# Altium PCB Access_System_ADP.PcbDoc
Units mil, origin at the board's own origin, x right, y up, seen from the top; angles counter-clockwise.
Board outline 2200 x 1400 mil, 2 copper layers (Top Layer, Bottom Layer); 4 components, 7 nets, 43 pads, 7 vias.
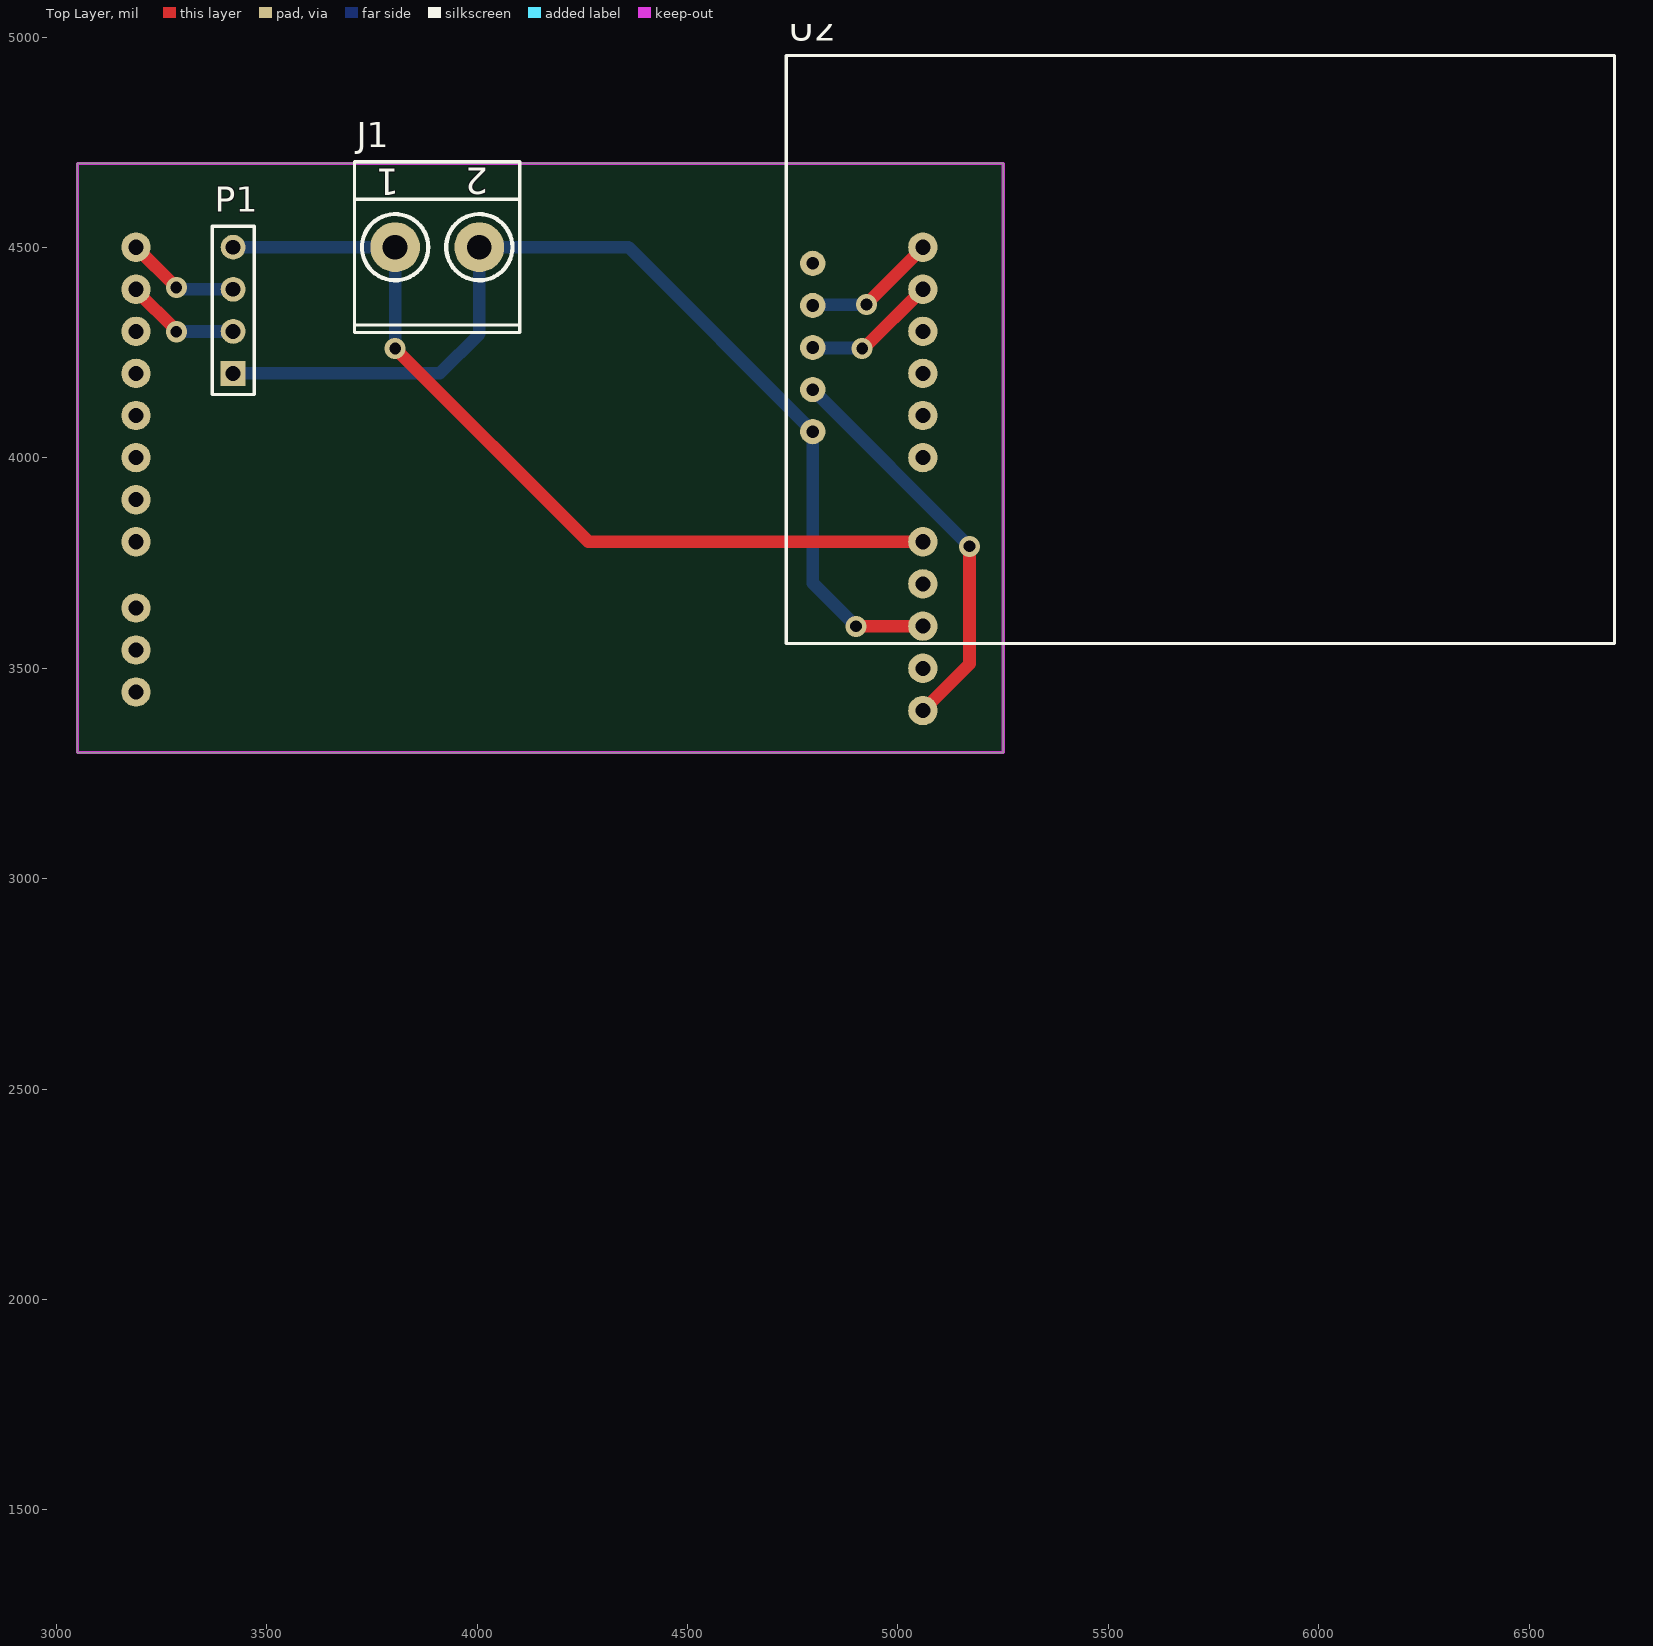
[diagram p0: Top Layer view]
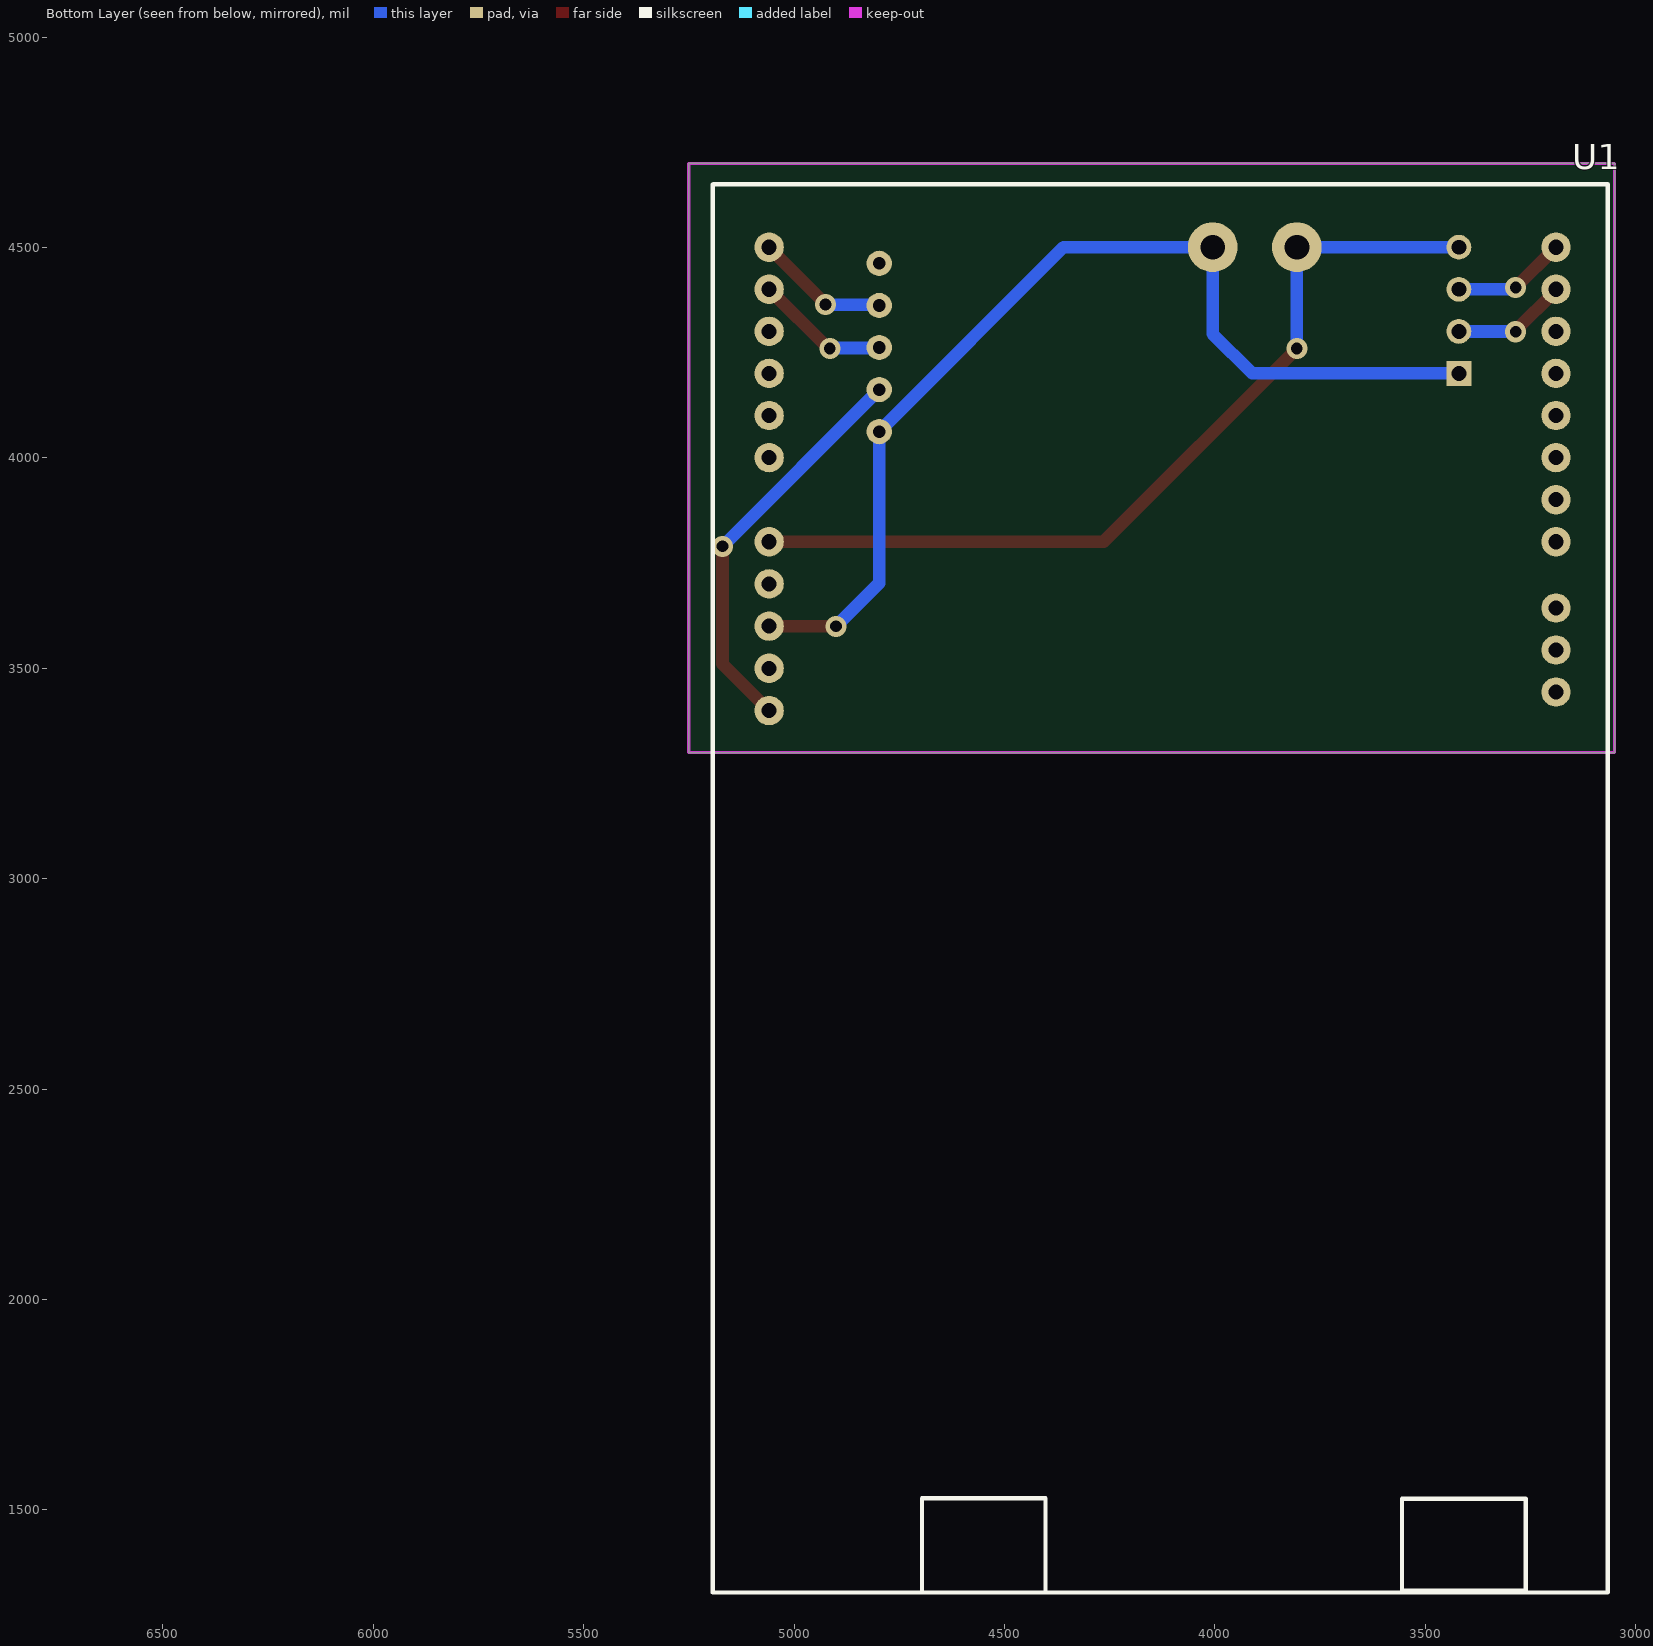
[diagram p1: Bottom Layer view, seen from below]

## Layer stack, top to bottom
Top Solder: solder mask 0.4, Solder Resist, Dk 3.5
Top Layer: signal copper 1.4
Dielectric 1: dielectric 12.6, FR-4, Dk 4.8
Bottom Layer: signal copper 1.4
Bottom Solder: solder mask 0.4, Solder Resist, Dk 3.5

## Board outline
3050,3300 5250,3300 5250,4700 3050,4700

## Design rules (kind name [scope] priority, off if disabled: settings)
Clearance [All] p1: gap=10 ignorepadtopadclearanceinfootprint=FALSE except(0: Arc-Hole Track-Hole SMDPad-Hole THPad-Hole Via-Hole Fill-Hole Poly-Hole Region-Hole Text-Hole)
PolygonConnect [All] p1: connectstyle=Relief reliefconductorwidth=10 reliefentries=4 polygonreliefangle="90 Angle" airgapwidth=10
RoutingVias [All] p1: holewidth=28 width=50 viastyle="Through Hole" minholewidth=28 minwidth=50 maxholewidth=28 maxwidth=50
SolderMaskExpansion [All] p1: expansion=4 istentingtop=FALSE
Width [All] p1: maxlimit=60 minlimit=10 preferedwidth=30 minimp=50.000000 maximp=50.000000 favimp=50.000000
30 further rules are at their usual default settings.

## Components (designator, comment, footprint, x,y, rotation, side; value= is the part's Value field where it differs from the comment)
J1 "Terminal_Block" "terminal block" 4005,4500.91 r90 top
P1 "Barcode" HDR1X4 3420,4200.91 r90 top
U1 "ADP_Corvette_T1" Corvette_T1 4232.06,3215.66 r90 bottom
U2 "ESP12_F_Module" ESP12_F_Holtek 4734.51,4956.59 r270 top

## Footprints (in the part's own frame and the unit in brackets; to place one, negate y for a bottom-side part, rotate by r counter-clockwise, add the part's x,y. Pads: shape width x height; smd on the part's side, far side on the other; paste and mask are expansions set on the pad)
Corvette_T1 [mil]
  rect 70x70 on Mech1: 1(-116.72,827.14)
  round 70 on Mech1: 2(-16.44,827.14) 3(83.84,827.14) 26(128.29,-1042.94) 27(28.46,-1042.94) 28(-71.36,-1042.94) 29(-171.19,-1042.94) 30(-271.01,-1042.94) 31(-370.84,-1042.94) 32(-470.66,-1042.94)
  round 70 hole 35.98: 4(184.12,827.14) 5(284.4,827.14) 6(384.68,827.14) 7(484.96,827.14) 8(585.24,827.14) 9(785.24,827.14) 10(885.24,827.14) 11(985.24,827.14) 12(1085.24,827.14) 13(1185.24,827.14) 14(1285.24,827.14) 15(1285.24,-1042.94) 16(1185.24,-1042.94) 17(1085.24,-1042.94) 18(985.24,-1042.94) 19(885.24,-1042.94) 20(785.24,-1042.94) 21(685.24,-1042.94) 22(585.24,-1042.94) 23(427.76,-1042.94) 24(327.94,-1042.94) 25(228.11,-1042.94)
  silkscreen extent -1912,-1166 1435,961
ESP12_F_Holtek [mil] "Holtek_Wi-Fi_module"
  round 60 hole 30: 1(494.09,62.99) 2(594.09,62.99) 3(694.09,62.99) 4(794.09,62.99) 5(894.09,62.99)
  silkscreen extent 0,0 1398,1969
HDR1X4 [mm] "Connector; Header; 4 Position"
  rect 1.5x1.5 hole 0.9: 1(0,0)
  round 1.5 hole 0.9: 2(2.54,0) 3(5.08,0) 4(7.62,0)
  silkscreen extent -1.27,-1.27 8.89,1.27
"terminal block" [mm]
  round 3 hole 1.5 paste+0 mask+0.051: 1(0,5.08) 2(0,0)
  silkscreen extent -5.15,-2.44 5.15,7.54

## Part data
J1: library part "Terminal Block"
P1: library part "Header 4", "Header, 4-Pin", LatestRevisionDate=17-Jul-2002, LatestRevisionNote="Re-released for DXP Platform.", Publisher="Altium Limited"
U1: library part Corvette_T1
U2: library part ESP12_F_Holtek

## Via types
v1: diameter 50, hole 28, Top Layer to Bottom Layer, 7 vias

## Nets (pads, with @x,y where several pads share a name; then routed paths per layer and width w, separated by ;. In a path a pad name is that pad's centre, name@x,y a point inside that pad or via, vN(x,y) a via of type N, cw(c..) or ccw(c..) an arc to the next point about the centre after c; other vN are vias at no path point)
3.3V: U1.4 U2.4 | length 962.9
  Top Layer w30: U1.4 5170,3510.58 v1(5170,3790)
  Bottom Layer w30: U2.4 v1(5170,3790)
5V: J1.1 P1.4 U1.8 | length 2070.3
  Top Layer w30: v1(3805,4260) 4264.09,3800.91 U1.8
  Bottom Layer w30: P1.4 J1.1 v1(3805,4260)
GND: J1.2 P1.1 U1.6 U2.5 | length 2468.3
  Top Layer w30: v1(4900,3600) 4900.17,3600.17 5059.03,3600.17 U1.6
  Bottom Layer w30: P1.1 3910.91,4200.91 4005,4295 J1.2 4359.09,4500.91 U2.5 4797.5,3702.5 v1(4900,3600)
Usart0_Rx_IO0: P1.3 U1.15 | length 272.3
  Top Layer w30: U1.15 v1(3285,4405)
  Bottom Layer w30: v1(3285,4405) 3290.41,4405 3294.51,4400.91 P1.3
Usart0_Tx_IO1: P1.2 U1.16 | length 276
  Top Layer w30: U1.16 3189.13,4398.39 3285,4302.52 v1(3285,4300)
  Bottom Layer w30: v1(3285,4300) 3285.45,4300.45 3419.55,4300.45 P1.2
Usart1_Rx_A4: U1.13 U2.3 | length 321.1
  Top Layer w30: v1(4915,4260) 4918.3,4260 U1.13
  Bottom Layer w30: U2.3 4798.75,4261.25 4913.75,4261.25 v1(4915,4260)
Usart1_Tx_A5: U1.14 U2.2 | length 320
  Top Layer w30: v1(4925,4365) 4925,4365.85 5059.2,4500.06 U1.14
  Bottom Layer w30: U2.2 4798.75,4363.75 4923.75,4363.75 v1(4925,4365)
pads on no net: U1.1 U1.2 U1.3 U1.5 U1.7 U1.9 U1.10 U1.11 U1.12 U1.17 U1.18 U1.19 U1.20 U1.21 U1.22 U1.23 U1.24 U1.25 U1.26 U1.27 U1.28 U1.29 U1.30 U1.31 U1.32 U2.1

## Keep-outs
Keep-Out Layer:
  the board outline again, w7.87

## Text inside footprints (layer, text, board x,y; h text height)
J1: Top Overlay "2" at 4026,4689.91 h62.99 r180; Top Overlay "1" at 3815,4687.91 h62.99 r180